# EAGLE board SparkFun_Line_Follower_Array_Panel_v10 (EAGLE 7.3.0), part 1 of 5
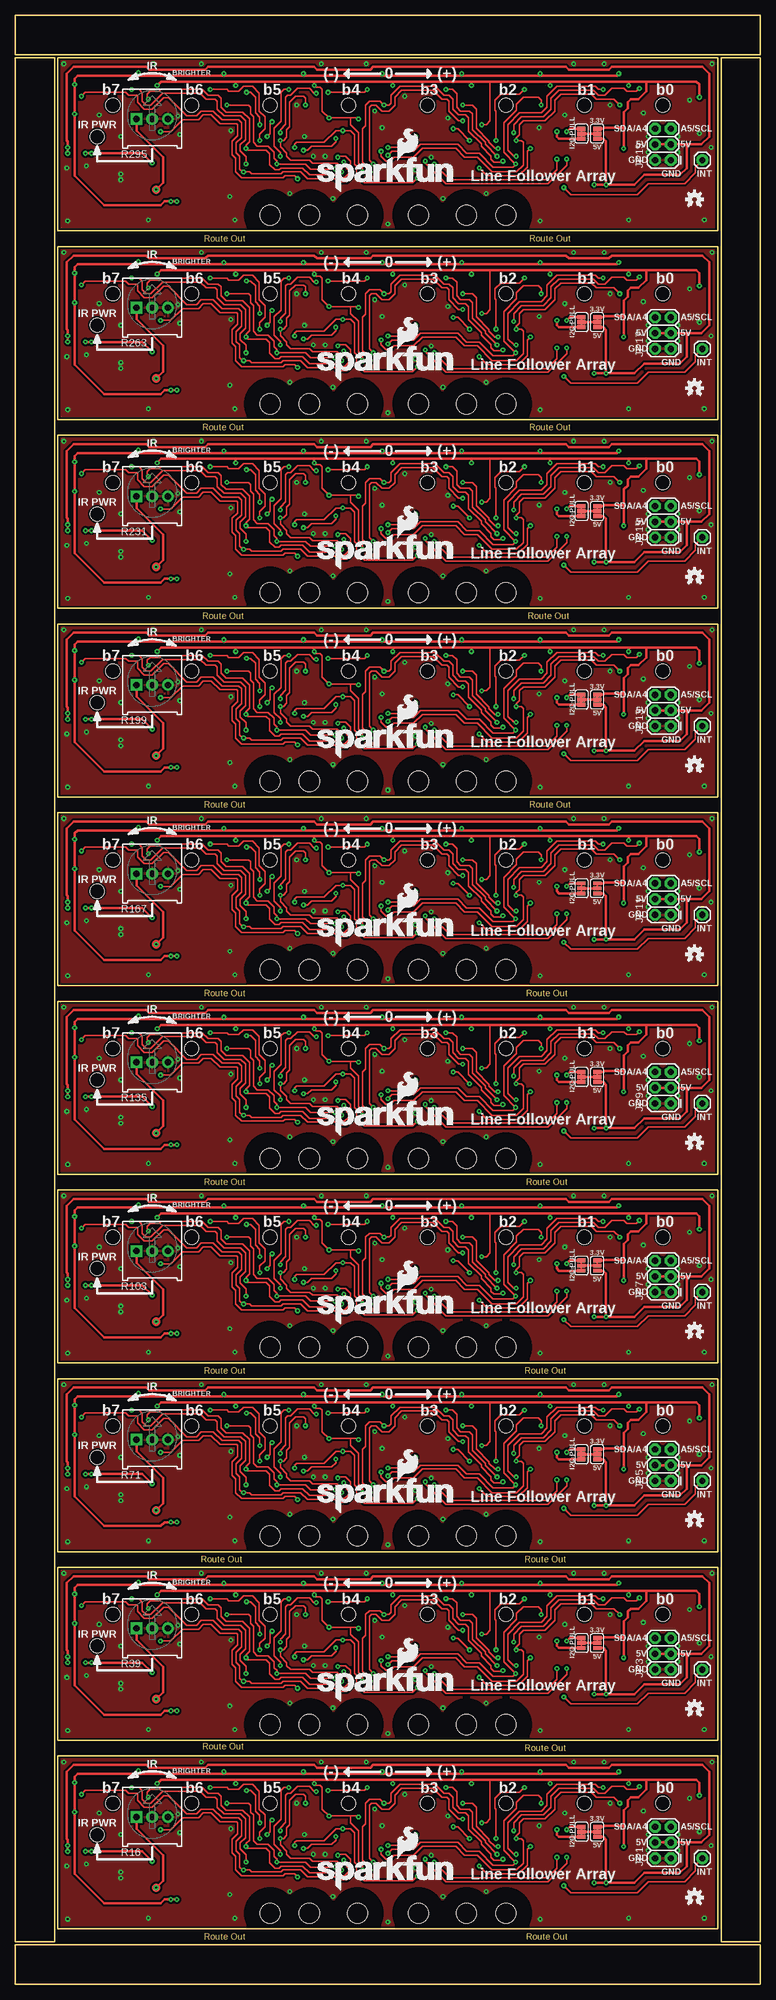
[diagram p0: board, top side]
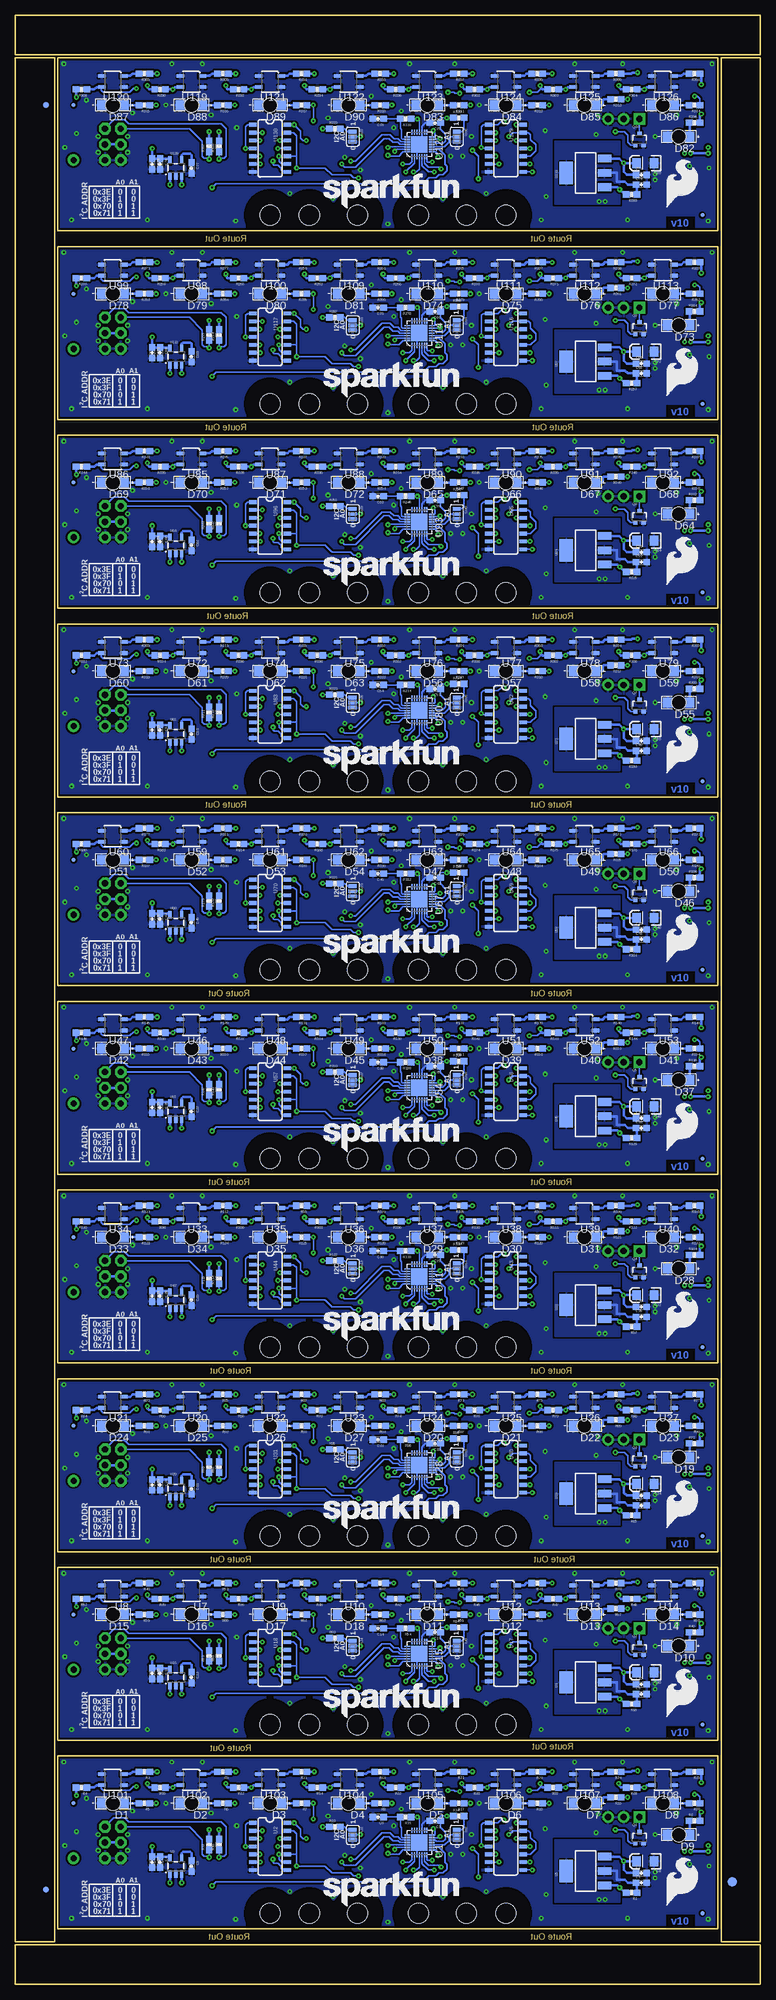
[diagram p1: board, bottom side, seen from below]

Size 120.4 x 318.01 mm. Coordinates in mm from the lower left corner, seen from the top.
Outline: 64 segments
Copper layers (1*16): Top 0.035mm / dielectric 1.5mm / Bottom 0.035mm
Design rules "SparkFun-2-layer *": minimum track width 7mil, minimum drill 15mil, track to track 7mil, track to pad 7mil, pad to pad 7mil, via to via 7mil, smd to smd 7mil, copper to edge 8mil, drill to drill 8mil, minimum pad ring 12mil, minimum via ring 10mil, stop-mask expansion 4mil, vias tented up to drill 20mil, thermal gap 10mil
Net classes: 0 default: clearance 0.305 mm
tRestrict: area 75.5,7.7 to 83,15.1; area 69.2,7.7 to 76.6,15.1; area 61.4,7.7 to 68.8,15.1; area 51.6,7.7 to 59,15.1; area 43.8,7.7 to 51.2,15.1; area 37.4,7.7 to 44.9,15.1; area 75.5,38.2 to 83,45.6; area 69.2,38.2 to 76.6,45.6; area 61.4,38.2 to 68.8,45.6; area 51.6,38.2 to 59,45.6; area 43.8,38.2 to 51.2,45.6; area 37.4,38.2 to 44.9,45.6; 48 more areas
bRestrict: area 37.4,7.7 to 44.9,15.1; area 43.8,7.7 to 51.2,15.1; area 51.6,7.7 to 59,15.1; area 61.4,7.7 to 68.8,15.1; area 69.2,7.7 to 76.6,15.1; area 75.5,7.7 to 83,15.1; area 37.4,38.2 to 44.9,45.6; area 43.8,38.2 to 51.2,45.6; area 51.6,38.2 to 59,45.6; area 61.4,38.2 to 68.8,45.6; area 69.2,38.2 to 76.6,45.6; area 75.5,38.2 to 83,45.6; 48 more areas

## Footprints (pad centres in the part's own frame; a part is rotated, then mirrored left to right if it is on the bottom)
0603-CAP = smd 1.1 x 1: 1 -0.85,0; 2 0.85,0
EIA3216 = smd 1.4 x 1.6: A 1.4,0; C -1.4,0
LED-1206-BOTTOM = smd 1.5 x 1.6: A -1.8,0; C 1.8,0 | hole 2.3: 0,0
FIDUCIAL-1.5X3 = smd 1.5 x 1.5: 1 0,0
FIDUCIAL-1X2 = smd 1 x 1: 1 0,0
MICRO-FIDUCIAL = smd 0.635 x 0.635: 1 0,0
2X3 = drill 1.016 pad 1.88 octagon: 1 0,0; 2 0,2.54; 3 2.54,0; 4 2.54,2.54; 5 5.08,0; 6 5.08,2.54
1X01 = drill 1.016 pad 1.88: 1 0,0
SOT323 = smd 0.7 x 0.7: 1 -0.65,-0.925; 2 0.65,-0.925; 3 0,0.925
0603-RES = smd 1.1 x 1: 1 -0.85,0; 2 0.85,0
3386U = drill 1.016 pad 1.88 square: 1 -2.54,-0.015 | drill 1.016 pad 1.88: 2 0,-0.015; 3 2.54,-0.015
PAD-JUMPER-3-2OF3_NC_BY_PASTE_YES_SILK_FULL_BOX = smd 0.635 x 1.27: 1 -0.813,0; 2 0,0; 3 0.813,0
PAD-JUMPER-3-3OF3_NC_BY_TRACE_YES_SILK_FULL_BOX = smd 0.635 x 1.27: 1 -0.813,0; 2 0,0; 3 0.813,0
PAD-JUMPER-3-2OF3_NC_BY_TRACE_YES_SILK_FULL_BOX = smd 0.635 x 1.27: 1 -0.813,0; 2 0,0; 3 0.813,0
STAND-OFF = hole 3.302: 0,0
QFN-28 = smd 0.85 x 0.2: 1 -1.975,1.2; 2 -1.975,0.8; 3 -1.975,0.4; 4 -1.975,0; 5 -1.975,-0.4; 6 -1.975,-0.8; 7 -1.975,-1.2; 15 1.975,-1.2; 16 1.975,-0.8; 17 1.975,-0.4; 18 1.975,0; 19 1.975,0.4; 20 1.975,0.8; 21 1.975,1.2 | smd 0.2 x 0.85: 8 -1.2,-1.975; 9 -0.8,-1.975; 10 -0.4,-1.975; 11 0,-1.975; 12 0.4,-1.975; 13 0.8,-1.975; 14 1.2,-1.975; 22 1.2,1.975; 23 0.8,1.975; 24 0.4,1.975; 25 0,1.975; 26 -0.4,1.975; 27 -0.8,1.975; 28 -1.2,1.975 | smd 2.65 x 2.65: 29 0,0
SO14 = smd 0.6 x 1.2: 1 -3.81,-2.8; 2 -2.54,-2.8; 3 -1.27,-2.8; 4 0,-2.8; 5 1.27,-2.8; 6 2.54,-2.8; 7 3.81,-2.8; 8 3.81,2.8; 9 2.54,2.8; 10 1.27,2.8; 11 0,2.8; 12 -1.27,2.8; 13 -2.54,2.8; 14 -3.81,2.8
SOT23-5 = smd 0.55 x 1.2: 1 -0.95,-1.3; 2 0,-1.3; 3 0.95,-1.3; 4 0.95,1.3; 5 -0.95,1.3
SOT223 = smd 1.219 x 2.235: 1 -2.311,-3.099; 2 0,-3.099; 3 2.311,-3.099 | smd 3.6 x 2.2: 4 0,3.099
QRE1113 = smd 1.2 x 0.6: 1 -1.8,-0.9; 2 1.8,-0.9; 3 1.8,0.9; 4 -1.8,0.9

## Placement (x,y rotation side)
C1  1.0uF  [0603-CAP]  19.24,16.35 0 bottom
C2  1.0uF  [0603-CAP]  19.24,17.94 0 bottom
C3  1.0uF  [0603-CAP]  52.58,26.35 180 bottom
C4  2.2uF  [0603-CAP]  97.03,19.68 270 bottom
C5  470pF  [0603-CAP]  91.95,19.05 270 bottom
C6  470pF  [0603-CAP]  61.79,26.99 180 bottom
C7  2.2uF  [0603-CAP]  98.3,19.68 270 bottom
C8  10uF  [EIA3216]  18.61,19.84 180 bottom
C9  1.0uF  [0603-CAP]  19.24,46.83 0 bottom
C10  1.0uF  [0603-CAP]  19.24,48.42 0 bottom
C11  1.0uF  [0603-CAP]  52.58,56.83 180 bottom
C12  2.2uF  [0603-CAP]  97.03,50.16 270 bottom
C13  470pF  [0603-CAP]  91.95,49.53 270 bottom
C14  470pF  [0603-CAP]  61.79,57.47 180 bottom
C15  2.2uF  [0603-CAP]  98.3,50.16 270 bottom
C16  10uF  [EIA3216]  18.61,50.32 180 bottom
C17  1.0uF  [0603-CAP]  19.24,77.31 0 bottom
C18  1.0uF  [0603-CAP]  19.24,78.9 0 bottom
C19  1.0uF  [0603-CAP]  52.58,87.31 180 bottom
C20  2.2uF  [0603-CAP]  97.03,80.64 270 bottom
C21  470pF  [0603-CAP]  91.95,80.01 270 bottom
C22  470pF  [0603-CAP]  61.79,87.95 180 bottom
C23  2.2uF  [0603-CAP]  98.3,80.64 270 bottom
C24  10uF  [EIA3216]  18.61,80.8 180 bottom
C25  1.0uF  [0603-CAP]  19.24,107.79 0 bottom
C26  1.0uF  [0603-CAP]  19.24,109.38 0 bottom
C27  1.0uF  [0603-CAP]  52.58,117.79 180 bottom
C28  2.2uF  [0603-CAP]  97.03,111.12 270 bottom
C29  470pF  [0603-CAP]  91.95,110.49 270 bottom
C30  470pF  [0603-CAP]  61.79,118.43 180 bottom
C31  2.2uF  [0603-CAP]  98.3,111.12 270 bottom
C32  10uF  [EIA3216]  18.61,111.28 180 bottom
C33  1.0uF  [0603-CAP]  19.24,138.27 0 bottom
C34  1.0uF  [0603-CAP]  19.24,139.86 0 bottom
C35  1.0uF  [0603-CAP]  52.58,148.27 180 bottom
C36  2.2uF  [0603-CAP]  97.03,141.6 270 bottom
C37  470pF  [0603-CAP]  91.95,140.97 270 bottom
C38  470pF  [0603-CAP]  61.79,148.91 180 bottom
C39  2.2uF  [0603-CAP]  98.3,141.6 270 bottom
C40  10uF  [EIA3216]  18.61,141.76 180 bottom
C41  1.0uF  [0603-CAP]  19.24,168.75 0 bottom
C42  1.0uF  [0603-CAP]  19.24,170.34 0 bottom
C43  1.0uF  [0603-CAP]  52.58,178.75 180 bottom
C44  2.2uF  [0603-CAP]  97.03,172.09 270 bottom
C45  470pF  [0603-CAP]  91.95,171.45 270 bottom
C46  470pF  [0603-CAP]  61.79,179.39 180 bottom
C47  2.2uF  [0603-CAP]  98.3,172.09 270 bottom
C48  10uF  [EIA3216]  18.61,172.24 180 bottom
C49  1.0uF  [0603-CAP]  19.24,199.23 0 bottom
C50  1.0uF  [0603-CAP]  19.24,200.82 0 bottom
C51  1.0uF  [0603-CAP]  52.58,209.23 180 bottom
C52  2.2uF  [0603-CAP]  97.03,202.56 270 bottom
C53  470pF  [0603-CAP]  91.95,201.93 270 bottom
C54  470pF  [0603-CAP]  61.79,209.87 180 bottom
C55  2.2uF  [0603-CAP]  98.3,202.56 270 bottom
C56  10uF  [EIA3216]  18.61,202.72 180 bottom
C57  1.0uF  [0603-CAP]  19.24,229.71 0 bottom
C58  1.0uF  [0603-CAP]  19.24,231.3 0 bottom
C59  1.0uF  [0603-CAP]  52.58,239.71 180 bottom
C60  2.2uF  [0603-CAP]  97.03,233.04 270 bottom
C61  470pF  [0603-CAP]  91.95,232.41 270 bottom
C62  470pF  [0603-CAP]  61.79,240.35 180 bottom
C63  2.2uF  [0603-CAP]  98.3,233.04 270 bottom
C64  10uF  [EIA3216]  18.61,233.2 180 bottom
C65  1.0uF  [0603-CAP]  19.24,260.19 0 bottom
C66  1.0uF  [0603-CAP]  19.24,261.78 0 bottom
C67  1.0uF  [0603-CAP]  52.58,270.19 180 bottom
C68  2.2uF  [0603-CAP]  97.03,263.52 270 bottom
C69  470pF  [0603-CAP]  91.95,262.89 270 bottom
C70  470pF  [0603-CAP]  61.79,270.83 180 bottom
C71  2.2uF  [0603-CAP]  98.3,263.52 270 bottom
C72  10uF  [EIA3216]  18.61,263.68 180 bottom
C73  1.0uF  [0603-CAP]  19.24,290.67 0 bottom
C74  1.0uF  [0603-CAP]  19.24,292.26 0 bottom
C75  1.0uF  [0603-CAP]  52.58,300.67 180 bottom
C76  2.2uF  [0603-CAP]  97.03,294 270 bottom
C77  470pF  [0603-CAP]  91.95,293.37 270 bottom
C78  470pF  [0603-CAP]  61.79,301.31 180 bottom
C79  2.2uF  [0603-CAP]  98.3,294 270 bottom
C80  10uF  [EIA3216]  18.61,294.16 180 bottom
D1  Green  [LED-1206-BOTTOM]  104.65,29.21 180 bottom
D2  Green  [LED-1206-BOTTOM]  91.95,29.21 180 bottom
D3  Green  [LED-1206-BOTTOM]  79.25,29.21 180 bottom
D4  Green  [LED-1206-BOTTOM]  66.55,29.21 180 bottom
D5  Green  [LED-1206-BOTTOM]  53.85,29.21 180 bottom
D6  Green  [LED-1206-BOTTOM]  41.15,29.21 180 bottom
D7  Green  [LED-1206-BOTTOM]  28.45,29.21 180 bottom
D8  Green  [LED-1206-BOTTOM]  15.75,29.21 180 bottom
D9  Green  [LED-1206-BOTTOM]  13.21,24.13 180 bottom
D10  Green  [LED-1206-BOTTOM]  13.21,54.61 180 bottom
D11  Green  [LED-1206-BOTTOM]  53.85,59.69 180 bottom
D12  Green  [LED-1206-BOTTOM]  41.15,59.69 180 bottom
D13  Green  [LED-1206-BOTTOM]  28.45,59.69 180 bottom
D14  Green  [LED-1206-BOTTOM]  15.75,59.69 180 bottom
D15  Green  [LED-1206-BOTTOM]  104.65,59.69 180 bottom
D16  Green  [LED-1206-BOTTOM]  91.95,59.69 180 bottom
D17  Green  [LED-1206-BOTTOM]  79.25,59.69 180 bottom
D18  Green  [LED-1206-BOTTOM]  66.55,59.69 180 bottom
D19  Green  [LED-1206-BOTTOM]  13.21,85.09 180 bottom
D20  Green  [LED-1206-BOTTOM]  53.85,90.17 180 bottom
D21  Green  [LED-1206-BOTTOM]  41.15,90.17 180 bottom
D22  Green  [LED-1206-BOTTOM]  28.45,90.17 180 bottom
D23  Green  [LED-1206-BOTTOM]  15.75,90.17 180 bottom
D24  Green  [LED-1206-BOTTOM]  104.65,90.17 180 bottom
D25  Green  [LED-1206-BOTTOM]  91.95,90.17 180 bottom
D26  Green  [LED-1206-BOTTOM]  79.25,90.17 180 bottom
D27  Green  [LED-1206-BOTTOM]  66.55,90.17 180 bottom
D28  Green  [LED-1206-BOTTOM]  13.21,115.57 180 bottom
D29  Green  [LED-1206-BOTTOM]  53.85,120.65 180 bottom
D30  Green  [LED-1206-BOTTOM]  41.15,120.65 180 bottom
D31  Green  [LED-1206-BOTTOM]  28.45,120.65 180 bottom
D32  Green  [LED-1206-BOTTOM]  15.75,120.65 180 bottom
D33  Green  [LED-1206-BOTTOM]  104.65,120.65 180 bottom
D34  Green  [LED-1206-BOTTOM]  91.95,120.65 180 bottom
D35  Green  [LED-1206-BOTTOM]  79.25,120.65 180 bottom
D36  Green  [LED-1206-BOTTOM]  66.55,120.65 180 bottom
D37  Green  [LED-1206-BOTTOM]  13.21,146.05 180 bottom
D38  Green  [LED-1206-BOTTOM]  53.85,151.13 180 bottom
D39  Green  [LED-1206-BOTTOM]  41.15,151.13 180 bottom
D40  Green  [LED-1206-BOTTOM]  28.45,151.13 180 bottom
D41  Green  [LED-1206-BOTTOM]  15.75,151.13 180 bottom
D42  Green  [LED-1206-BOTTOM]  104.65,151.13 180 bottom
D43  Green  [LED-1206-BOTTOM]  91.95,151.13 180 bottom
D44  Green  [LED-1206-BOTTOM]  79.25,151.13 180 bottom
D45  Green  [LED-1206-BOTTOM]  66.55,151.13 180 bottom
D46  Green  [LED-1206-BOTTOM]  13.21,176.53 180 bottom
D47  Green  [LED-1206-BOTTOM]  53.85,181.61 180 bottom
D48  Green  [LED-1206-BOTTOM]  41.15,181.61 180 bottom
D49  Green  [LED-1206-BOTTOM]  28.45,181.61 180 bottom
D50  Green  [LED-1206-BOTTOM]  15.75,181.61 180 bottom
D51  Green  [LED-1206-BOTTOM]  104.65,181.61 180 bottom
D52  Green  [LED-1206-BOTTOM]  91.95,181.61 180 bottom
D53  Green  [LED-1206-BOTTOM]  79.25,181.61 180 bottom
D54  Green  [LED-1206-BOTTOM]  66.55,181.61 180 bottom
D55  Green  [LED-1206-BOTTOM]  13.21,207.01 180 bottom
D56  Green  [LED-1206-BOTTOM]  53.85,212.09 180 bottom
D57  Green  [LED-1206-BOTTOM]  41.15,212.09 180 bottom
D58  Green  [LED-1206-BOTTOM]  28.45,212.09 180 bottom
D59  Green  [LED-1206-BOTTOM]  15.75,212.09 180 bottom
D60  Green  [LED-1206-BOTTOM]  104.65,212.09 180 bottom
D61  Green  [LED-1206-BOTTOM]  91.95,212.09 180 bottom
D62  Green  [LED-1206-BOTTOM]  79.25,212.09 180 bottom
D63  Green  [LED-1206-BOTTOM]  66.55,212.09 180 bottom
D64  Green  [LED-1206-BOTTOM]  13.21,237.49 180 bottom
D65  Green  [LED-1206-BOTTOM]  53.85,242.57 180 bottom
D66  Green  [LED-1206-BOTTOM]  41.15,242.57 180 bottom
D67  Green  [LED-1206-BOTTOM]  28.45,242.57 180 bottom
D68  Green  [LED-1206-BOTTOM]  15.75,242.57 180 bottom
D69  Green  [LED-1206-BOTTOM]  104.65,242.57 180 bottom
D70  Green  [LED-1206-BOTTOM]  91.95,242.57 180 bottom
D71  Green  [LED-1206-BOTTOM]  79.25,242.57 180 bottom
D72  Green  [LED-1206-BOTTOM]  66.55,242.57 180 bottom
D73  Green  [LED-1206-BOTTOM]  13.21,267.97 180 bottom
D74  Green  [LED-1206-BOTTOM]  53.85,273.05 180 bottom
D75  Green  [LED-1206-BOTTOM]  41.15,273.05 180 bottom
D76  Green  [LED-1206-BOTTOM]  28.45,273.05 180 bottom
D77  Green  [LED-1206-BOTTOM]  15.75,273.05 180 bottom
D78  Green  [LED-1206-BOTTOM]  104.65,273.05 180 bottom
D79  Green  [LED-1206-BOTTOM]  91.95,273.05 180 bottom
D80  Green  [LED-1206-BOTTOM]  79.25,273.05 180 bottom
D81  Green  [LED-1206-BOTTOM]  66.55,273.05 180 bottom
D82  Green  [LED-1206-BOTTOM]  13.21,298.45 180 bottom
D83  Green  [LED-1206-BOTTOM]  53.85,303.53 180 bottom
D84  Green  [LED-1206-BOTTOM]  41.15,303.53 180 bottom
D85  Green  [LED-1206-BOTTOM]  28.45,303.53 180 bottom
D86  Green  [LED-1206-BOTTOM]  15.75,303.53 180 bottom
D87  Green  [LED-1206-BOTTOM]  104.65,303.53 180 bottom
D88  Green  [LED-1206-BOTTOM]  91.95,303.53 180 bottom
D89  Green  [LED-1206-BOTTOM]  79.25,303.53 180 bottom
D90  Green  [LED-1206-BOTTOM]  66.55,303.53 180 bottom
E$1  [FIDUCIAL-1.5X3]  4.57,16.51 0 bottom
E$5  [FIDUCIAL-1X2]  115.44,15.24 0 bottom
E$6  [FIDUCIAL-1X2]  115.44,303.53 180 bottom
FID1  FIDUCIALUFIDUCIAL  [MICRO-FIDUCIAL]  9.4,11.43 0 bottom
FID2  FIDUCIALUFIDUCIAL  [MICRO-FIDUCIAL]  111,29.21 0 bottom
FID3  FIDUCIALUFIDUCIAL  [MICRO-FIDUCIAL]  9.4,41.91 0 bottom
FID4  FIDUCIALUFIDUCIAL  [MICRO-FIDUCIAL]  111,59.69 0 bottom
FID5  FIDUCIALUFIDUCIAL  [MICRO-FIDUCIAL]  9.4,72.39 0 bottom
FID6  FIDUCIALUFIDUCIAL  [MICRO-FIDUCIAL]  111,90.17 0 bottom
FID7  FIDUCIALUFIDUCIAL  [MICRO-FIDUCIAL]  9.4,102.87 0 bottom
FID8  FIDUCIALUFIDUCIAL  [MICRO-FIDUCIAL]  111,120.65 0 bottom
FID9  FIDUCIALUFIDUCIAL  [MICRO-FIDUCIAL]  9.4,133.35 0 bottom
FID10  FIDUCIALUFIDUCIAL  [MICRO-FIDUCIAL]  111,151.13 0 bottom
FID11  FIDUCIALUFIDUCIAL  [MICRO-FIDUCIAL]  9.4,163.83 0 bottom
FID12  FIDUCIALUFIDUCIAL  [MICRO-FIDUCIAL]  111,181.61 0 bottom
FID13  FIDUCIALUFIDUCIAL  [MICRO-FIDUCIAL]  9.4,194.31 0 bottom
FID14  FIDUCIALUFIDUCIAL  [MICRO-FIDUCIAL]  111,212.09 0 bottom
FID15  FIDUCIALUFIDUCIAL  [MICRO-FIDUCIAL]  9.4,224.79 0 bottom
FID16  FIDUCIALUFIDUCIAL  [MICRO-FIDUCIAL]  111,242.57 0 bottom
FID17  FIDUCIALUFIDUCIAL  [MICRO-FIDUCIAL]  9.4,255.27 0 bottom
FID18  FIDUCIALUFIDUCIAL  [MICRO-FIDUCIAL]  111,273.05 0 bottom
FID19  FIDUCIALUFIDUCIAL  [MICRO-FIDUCIAL]  9.4,285.75 0 bottom
FID20  FIDUCIALUFIDUCIAL  [MICRO-FIDUCIAL]  111,303.53 0 bottom
JP1  FEMALE 2x3  [2X3]  105.92,20.32 90 top
JP2  INT  [1X01]  111,20.32 0 top
JP3  FEMALE 2x3  [2X3]  105.92,50.8 90 top
JP4  INT  [1X01]  111,50.8 0 top
JP5  FEMALE 2x3  [2X3]  105.92,81.28 90 top
JP6  INT  [1X01]  111,81.28 0 top
JP7  FEMALE 2x3  [2X3]  105.92,111.76 90 top
JP8  INT  [1X01]  111,111.76 0 top
JP9  FEMALE 2x3  [2X3]  105.92,142.24 90 top
JP10  INT  [1X01]  111,142.24 0 top
JP11  FEMALE 2x3  [2X3]  105.92,172.72 90 top
JP12  INT  [1X01]  111,172.72 0 top
JP13  FEMALE 2x3  [2X3]  105.92,203.2 90 top
JP14  INT  [1X01]  111,203.2 0 top
JP15  FEMALE 2x3  [2X3]  105.92,233.68 90 top
JP16  INT  [1X01]  111,233.68 0 top
JP17  FEMALE 2x3  [2X3]  105.92,264.16 90 top
JP18  INT  [1X01]  111,264.16 0 top
JP19  FEMALE 2x3  [2X3]  105.92,294.64 90 top
JP20  INT  [1X01]  111,294.64 0 top
LOGO1  SFE_LOGO_NAME_FLAME.2_INCH  [SFE_LOGO_NAME_FLAME_.2]  48.13,15.08 0 top
LOGO2  SFE_LOGO_NAME.2_INCH  [SFE_LOGO_NAME_.2]  70.55,12.53 0 bottom
LOGO3  SFE_LOGO_NAME.2_INCH  [SFE_LOGO_NAME_.2]  70.55,43.01 0 bottom
LOGO4  SFE_LOGO_FLAME.3_INCH  [SFE_LOGO_FLAME_.3]  15.67,43.05 0 bottom
LOGO5  SFE_LOGO_FLAME.3_INCH  [SFE_LOGO_FLAME_.3]  15.67,12.57 0 bottom
LOGO6  OSHW-LOGOS  [OSHW-LOGO-S]  109.73,13.97 0 top
LOGO7  OSHW-LOGOS  [OSHW-LOGO-S]  109.73,44.45 0 top
LOGO8  SFE_LOGO_NAME_FLAME.2_INCH  [SFE_LOGO_NAME_FLAME_.2]  48.13,45.56 0 top
LOGO9  SFE_LOGO_NAME.2_INCH  [SFE_LOGO_NAME_.2]  70.55,73.49 0 bottom
LOGO10  SFE_LOGO_FLAME.3_INCH  [SFE_LOGO_FLAME_.3]  15.67,73.53 0 bottom
LOGO11  OSHW-LOGOS  [OSHW-LOGO-S]  109.73,74.93 0 top
LOGO12  SFE_LOGO_NAME_FLAME.2_INCH  [SFE_LOGO_NAME_FLAME_.2]  48.13,76.04 0 top
LOGO13  SFE_LOGO_NAME.2_INCH  [SFE_LOGO_NAME_.2]  70.55,103.97 0 bottom
LOGO14  SFE_LOGO_FLAME.3_INCH  [SFE_LOGO_FLAME_.3]  15.67,104.01 0 bottom
LOGO15  OSHW-LOGOS  [OSHW-LOGO-S]  109.73,105.41 0 top
LOGO16  SFE_LOGO_NAME_FLAME.2_INCH  [SFE_LOGO_NAME_FLAME_.2]  48.13,106.52 0 top
LOGO17  SFE_LOGO_NAME.2_INCH  [SFE_LOGO_NAME_.2]  70.55,134.45 0 bottom
LOGO18  SFE_LOGO_FLAME.3_INCH  [SFE_LOGO_FLAME_.3]  15.67,134.49 0 bottom
LOGO19  OSHW-LOGOS  [OSHW-LOGO-S]  109.73,135.89 0 top
LOGO20  SFE_LOGO_NAME_FLAME.2_INCH  [SFE_LOGO_NAME_FLAME_.2]  48.13,137 0 top
LOGO21  SFE_LOGO_NAME.2_INCH  [SFE_LOGO_NAME_.2]  70.55,164.93 0 bottom
LOGO22  SFE_LOGO_FLAME.3_INCH  [SFE_LOGO_FLAME_.3]  15.67,164.97 0 bottom
LOGO23  OSHW-LOGOS  [OSHW-LOGO-S]  109.73,166.37 0 top
LOGO24  SFE_LOGO_NAME_FLAME.2_INCH  [SFE_LOGO_NAME_FLAME_.2]  48.13,167.48 0 top
LOGO25  SFE_LOGO_NAME.2_INCH  [SFE_LOGO_NAME_.2]  70.55,195.41 0 bottom
LOGO26  SFE_LOGO_FLAME.3_INCH  [SFE_LOGO_FLAME_.3]  15.67,195.45 0 bottom
LOGO27  OSHW-LOGOS  [OSHW-LOGO-S]  109.73,196.85 0 top
LOGO28  SFE_LOGO_NAME_FLAME.2_INCH  [SFE_LOGO_NAME_FLAME_.2]  48.13,197.96 0 top
LOGO29  SFE_LOGO_NAME.2_INCH  [SFE_LOGO_NAME_.2]  70.55,225.89 0 bottom
LOGO30  SFE_LOGO_FLAME.3_INCH  [SFE_LOGO_FLAME_.3]  15.67,225.93 0 bottom
LOGO31  OSHW-LOGOS  [OSHW-LOGO-S]  109.73,227.33 0 top
LOGO32  SFE_LOGO_NAME_FLAME.2_INCH  [SFE_LOGO_NAME_FLAME_.2]  48.13,228.44 0 top
LOGO33  SFE_LOGO_NAME.2_INCH  [SFE_LOGO_NAME_.2]  70.55,256.37 0 bottom
LOGO34  SFE_LOGO_FLAME.3_INCH  [SFE_LOGO_FLAME_.3]  15.67,256.41 0 bottom
LOGO35  OSHW-LOGOS  [OSHW-LOGO-S]  109.73,257.81 0 top
LOGO36  SFE_LOGO_NAME_FLAME.2_INCH  [SFE_LOGO_NAME_FLAME_.2]  48.13,258.92 0 top
LOGO37  SFE_LOGO_NAME.2_INCH  [SFE_LOGO_NAME_.2]  70.55,286.85 0 bottom
LOGO38  SFE_LOGO_FLAME.3_INCH  [SFE_LOGO_FLAME_.3]  15.67,286.89 0 bottom
LOGO39  OSHW-LOGOS  [OSHW-LOGO-S]  109.73,288.29 0 top
LOGO40  SFE_LOGO_NAME_FLAME.2_INCH  [SFE_LOGO_NAME_FLAME_.2]  48.13,289.4 0 top
Q1  MOSFET-NCHANNEL2N7002PW  [SOT323]  19.56,23.65 0 bottom
Q2  MOSFET-NCHANNEL2N7002PW  [SOT323]  19.56,54.13 0 bottom
Q3  MOSFET-NCHANNEL2N7002PW  [SOT323]  19.56,84.61 0 bottom
Q4  MOSFET-NCHANNEL2N7002PW  [SOT323]  19.56,115.09 0 bottom
Q5  MOSFET-NCHANNEL2N7002PW  [SOT323]  19.56,145.57 0 bottom
Q6  MOSFET-NCHANNEL2N7002PW  [SOT323]  19.56,176.05 0 bottom
Q7  MOSFET-NCHANNEL2N7002PW  [SOT323]  19.56,206.53 0 bottom
Q8  MOSFET-NCHANNEL2N7002PW  [SOT323]  19.56,237.01 0 bottom
Q9  MOSFET-NCHANNEL2N7002PW  [SOT323]  19.56,267.49 0 bottom
Q10  MOSFET-NCHANNEL2N7002PW  [SOT323]  19.56,297.97 0 bottom
R1  4.7K  [0603-RES]  20.83,14.76 180 bottom
R2  330  [0603-RES]  10.67,26.35 0 bottom
R3  100  [0603-RES]  99.57,34.29 180 bottom
R4  68.1k  [0603-RES]  109.73,31.75 180 bottom
R5  1K  [0603-RES]  99.57,29.21 180 bottom
R6  1K  [0603-RES]  86.87,29.21 180 bottom
R7  1K  [0603-RES]  74.17,29.21 180 bottom
R8  1K  [0603-RES]  61.47,29.21 180 bottom
R9  100  [0603-RES]  86.87,34.29 180 bottom
R10  68.1k  [0603-RES]  97.03,31.75 180 bottom
R11  100  [0603-RES]  74.17,34.29 180 bottom
R12  68.1k  [0603-RES]  84.33,31.75 180 bottom
R13  100  [0603-RES]  61.47,34.29 180 bottom
R14  68.1k  [0603-RES]  71.63,31.75 180 bottom
R15  4.7K  [0603-RES]  20.83,45.24 180 bottom
R16  TSR-3386  [3386U]  22.1,26.99 0 top
R17  1K  [0603-RES]  48.77,29.21 180 bottom
R18  1K  [0603-RES]  36.07,29.21 180 bottom
R19  1K  [0603-RES]  23.37,30.16 180 bottom
R20  1K  [0603-RES]  10.67,29.21 180 bottom
R21  100  [0603-RES]  48.77,34.29 180 bottom
R22  68.1k  [0603-RES]  58.93,31.75 180 bottom
R23  100  [0603-RES]  36.07,34.29 180 bottom
R24  100  [0603-RES]  23.37,34.29 180 bottom
R25  100  [0603-RES]  10.67,34.29 180 bottom
R26  68.1k  [0603-RES]  46.23,31.75 180 bottom
R27  68.1k  [0603-RES]  33.53,31.75 180 bottom
R28  68.1k  [0603-RES]  20.83,31.75 180 bottom
R29  68.1k  [0603-RES]  97.03,62.23 180 bottom
R30  4.7K  [0603-RES]  87.5,22.54 90 bottom
R31  100  [0603-RES]  57.34,26.99 180 bottom
R32  4.7K  [0603-RES]  89.09,22.54 90 bottom
R33  4.7K  [0603-RES]  68.77,25.4 0 bottom
R34  4.7K  [0603-RES]  48.77,27.15 0 bottom
R35  100  [0603-RES]  74.17,64.77 180 bottom
R36  68.1k  [0603-RES]  84.33,62.23 180 bottom
R37  100  [0603-RES]  61.47,64.77 180 bottom
R38  68.1k  [0603-RES]  71.63,62.23 180 bottom
R39  TSR-3386  [3386U]  22.1,57.47 0 top
R40  330  [0603-RES]  10.67,56.83 0 bottom
R41  100  [0603-RES]  48.77,64.77 180 bottom
R42  68.1k  [0603-RES]  58.93,62.23 180 bottom
R43  100  [0603-RES]  36.07,64.77 180 bottom
R44  100  [0603-RES]  23.37,64.77 180 bottom
R45  100  [0603-RES]  10.67,64.77 180 bottom
R46  68.1k  [0603-RES]  46.23,62.23 180 bottom
R47  68.1k  [0603-RES]  33.53,62.23 180 bottom
R48  68.1k  [0603-RES]  20.83,62.23 180 bottom
R49  100  [0603-RES]  99.57,64.77 180 bottom
R50  4.7K  [0603-RES]  87.5,53.02 90 bottom
R51  4.7K  [0603-RES]  89.09,53.02 90 bottom
R52  68.1k  [0603-RES]  109.73,62.23 180 bottom
R53  100  [0603-RES]  86.87,64.77 180 bottom
R54  100  [0603-RES]  57.34,57.47 180 bottom
R55  1K  [0603-RES]  48.77,59.69 180 bottom
R56  1K  [0603-RES]  36.07,59.69 180 bottom
R57  1K  [0603-RES]  23.37,60.64 180 bottom
R58  1K  [0603-RES]  10.67,59.69 180 bottom
R59  1K  [0603-RES]  99.57,59.69 180 bottom
R60  1K  [0603-RES]  86.87,59.69 180 bottom
R61  1K  [0603-RES]  74.17,59.69 180 bottom
R62  1K  [0603-RES]  61.47,59.69 180 bottom
R63  4.7K  [0603-RES]  68.77,55.88 0 bottom
R64  4.7K  [0603-RES]  48.77,57.63 0 bottom
R65  4.7K  [0603-RES]  20.83,75.72 180 bottom
R66  68.1k  [0603-RES]  97.03,92.71 180 bottom
R67  100  [0603-RES]  74.17,95.25 180 bottom
R68  68.1k  [0603-RES]  84.33,92.71 180 bottom
R69  100  [0603-RES]  61.47,95.25 180 bottom
R70  68.1k  [0603-RES]  71.63,92.71 180 bottom
R71  TSR-3386  [3386U]  22.1,87.95 0 top
R72  330  [0603-RES]  10.67,87.31 0 bottom
R73  100  [0603-RES]  48.77,95.25 180 bottom
R74  68.1k  [0603-RES]  58.93,92.71 180 bottom
R75  100  [0603-RES]  36.07,95.25 180 bottom
R76  100  [0603-RES]  23.37,95.25 180 bottom
R77  100  [0603-RES]  10.67,95.25 180 bottom
R78  68.1k  [0603-RES]  46.23,92.71 180 bottom
R79  68.1k  [0603-RES]  33.53,92.71 180 bottom
R80  68.1k  [0603-RES]  20.83,92.71 180 bottom
R81  100  [0603-RES]  99.57,95.25 180 bottom
R82  4.7K  [0603-RES]  87.5,83.5 90 bottom
R83  4.7K  [0603-RES]  89.09,83.5 90 bottom
R84  68.1k  [0603-RES]  109.73,92.71 180 bottom
R85  100  [0603-RES]  86.87,95.25 180 bottom
R86  100  [0603-RES]  57.34,87.95 180 bottom
R87  1K  [0603-RES]  48.77,90.17 180 bottom
R88  1K  [0603-RES]  36.07,90.17 180 bottom
R89  1K  [0603-RES]  23.37,91.12 180 bottom
R90  1K  [0603-RES]  10.67,90.17 180 bottom
R91  1K  [0603-RES]  99.57,90.17 180 bottom
R92  1K  [0603-RES]  86.87,90.17 180 bottom
R93  1K  [0603-RES]  74.17,90.17 180 bottom
R94  1K  [0603-RES]  61.47,90.17 180 bottom
R95  4.7K  [0603-RES]  68.77,86.36 0 bottom
R96  4.7K  [0603-RES]  48.77,88.11 0 bottom
R97  4.7K  [0603-RES]  20.83,106.2 180 bottom
R98  68.1k  [0603-RES]  97.03,123.19 180 bottom
R99  100  [0603-RES]  74.17,125.73 180 bottom
R100  68.1k  [0603-RES]  84.33,123.19 180 bottom
R101  100  [0603-RES]  61.47,125.73 180 bottom
R102  68.1k  [0603-RES]  71.63,123.19 180 bottom
R103  TSR-3386  [3386U]  22.1,118.43 0 top
R104  330  [0603-RES]  10.67,117.79 0 bottom
R105  100  [0603-RES]  48.77,125.73 180 bottom
R106  68.1k  [0603-RES]  58.93,123.19 180 bottom
R107  100  [0603-RES]  36.07,125.73 180 bottom
R108  100  [0603-RES]  23.37,125.73 180 bottom
R109  100  [0603-RES]  10.67,125.73 180 bottom
R110  68.1k  [0603-RES]  46.23,123.19 180 bottom
R111  68.1k  [0603-RES]  33.53,123.19 180 bottom
R112  68.1k  [0603-RES]  20.83,123.19 180 bottom
R113  100  [0603-RES]  99.57,125.73 180 bottom
R114  4.7K  [0603-RES]  87.5,113.98 90 bottom
R115  4.7K  [0603-RES]  89.09,113.98 90 bottom
R116  68.1k  [0603-RES]  109.73,123.19 180 bottom
R117  100  [0603-RES]  86.87,125.73 180 bottom
R118  100  [0603-RES]  57.34,118.43 180 bottom
R119  1K  [0603-RES]  48.77,120.65 180 bottom
R120  1K  [0603-RES]  36.07,120.65 180 bottom
R121  1K  [0603-RES]  23.37,121.6 180 bottom
R122  1K  [0603-RES]  10.67,120.65 180 bottom
R123  1K  [0603-RES]  99.57,120.65 180 bottom
R124  1K  [0603-RES]  86.87,120.65 180 bottom
R125  1K  [0603-RES]  74.17,120.65 180 bottom
R126  1K  [0603-RES]  61.47,120.65 180 bottom
R127  4.7K  [0603-RES]  68.77,116.84 0 bottom
R128  4.7K  [0603-RES]  48.77,118.59 0 bottom
R129  4.7K  [0603-RES]  20.83,136.68 180 bottom
R130  68.1k  [0603-RES]  97.03,153.67 180 bottom
R131  100  [0603-RES]  74.17,156.21 180 bottom
R132  68.1k  [0603-RES]  84.33,153.67 180 bottom
R133  100  [0603-RES]  61.47,156.21 180 bottom
R134  68.1k  [0603-RES]  71.63,153.67 180 bottom
R135  TSR-3386  [3386U]  22.1,148.91 0 top
R136  330  [0603-RES]  10.67,148.27 0 bottom
R137  100  [0603-RES]  48.77,156.21 180 bottom
R138  68.1k  [0603-RES]  58.93,153.67 180 bottom
R139  100  [0603-RES]  36.07,156.21 180 bottom
R140  100  [0603-RES]  23.37,156.21 180 bottom
R141  100  [0603-RES]  10.67,156.21 180 bottom
R142  68.1k  [0603-RES]  46.23,153.67 180 bottom
R143  68.1k  [0603-RES]  33.53,153.67 180 bottom
R144  68.1k  [0603-RES]  20.83,153.67 180 bottom
R145  100  [0603-RES]  99.57,156.21 180 bottom
R146  4.7K  [0603-RES]  87.5,144.46 90 bottom
R147  4.7K  [0603-RES]  89.09,144.46 90 bottom
R148  68.1k  [0603-RES]  109.73,153.67 180 bottom
R149  100  [0603-RES]  86.87,156.21 180 bottom
R150  100  [0603-RES]  57.34,148.91 180 bottom
R151  1K  [0603-RES]  48.77,151.13 180 bottom
R152  1K  [0603-RES]  36.07,151.13 180 bottom
R153  1K  [0603-RES]  23.37,152.08 180 bottom
R154  1K  [0603-RES]  10.67,151.13 180 bottom
R155  1K  [0603-RES]  99.57,151.13 180 bottom
R156  1K  [0603-RES]  86.87,151.13 180 bottom
R157  1K  [0603-RES]  74.17,151.13 180 bottom
R158  1K  [0603-RES]  61.47,151.13 180 bottom
R159  4.7K  [0603-RES]  68.77,147.32 0 bottom
R160  4.7K  [0603-RES]  48.77,149.07 0 bottom
R161  4.7K  [0603-RES]  20.83,167.16 180 bottom
R162  68.1k  [0603-RES]  97.03,184.15 180 bottom
R163  100  [0603-RES]  74.17,186.69 180 bottom
R164  68.1k  [0603-RES]  84.33,184.15 180 bottom
R165  100  [0603-RES]  61.47,186.69 180 bottom
R166  68.1k  [0603-RES]  71.63,184.15 180 bottom
R167  TSR-3386  [3386U]  22.1,179.39 0 top
R168  330  [0603-RES]  10.67,178.75 0 bottom
R169  100  [0603-RES]  48.77,186.69 180 bottom
R170  68.1k  [0603-RES]  58.93,184.15 180 bottom
R171  100  [0603-RES]  36.07,186.69 180 bottom
R172  100  [0603-RES]  23.37,186.69 180 bottom
R173  100  [0603-RES]  10.67,186.69 180 bottom
R174  68.1k  [0603-RES]  46.23,184.15 180 bottom
R175  68.1k  [0603-RES]  33.53,184.15 180 bottom
R176  68.1k  [0603-RES]  20.83,184.15 180 bottom
R177  100  [0603-RES]  99.57,186.69 180 bottom
R178  4.7K  [0603-RES]  87.5,174.94 90 bottom
R179  4.7K  [0603-RES]  89.09,174.94 90 bottom
R180  68.1k  [0603-RES]  109.73,184.15 180 bottom
R181  100  [0603-RES]  86.87,186.69 180 bottom
R182  100  [0603-RES]  57.34,179.39 180 bottom
R183  1K  [0603-RES]  48.77,181.61 180 bottom
R184  1K  [0603-RES]  36.07,181.61 180 bottom
R185  1K  [0603-RES]  23.37,182.56 180 bottom
R186  1K  [0603-RES]  10.67,181.61 180 bottom
R187  1K  [0603-RES]  99.57,181.61 180 bottom
R188  1K  [0603-RES]  86.87,181.61 180 bottom
R189  1K  [0603-RES]  74.17,181.61 180 bottom
R190  1K  [0603-RES]  61.47,181.61 180 bottom
R191  4.7K  [0603-RES]  68.77,177.8 0 bottom
R192  4.7K  [0603-RES]  48.77,179.55 0 bottom
R193  4.7K  [0603-RES]  20.83,197.64 180 bottom
R194  68.1k  [0603-RES]  97.03,214.63 180 bottom
R195  100  [0603-RES]  74.17,217.17 180 bottom
R196  68.1k  [0603-RES]  84.33,214.63 180 bottom
R197  100  [0603-RES]  61.47,217.17 180 bottom
R198  68.1k  [0603-RES]  71.63,214.63 180 bottom
R199  TSR-3386  [3386U]  22.1,209.87 0 top
R200  330  [0603-RES]  10.67,209.23 0 bottom
R201  100  [0603-RES]  48.77,217.17 180 bottom
R202  68.1k  [0603-RES]  58.93,214.63 180 bottom
R203  100  [0603-RES]  36.07,217.17 180 bottom
R204  100  [0603-RES]  23.37,217.17 180 bottom
R205  100  [0603-RES]  10.67,217.17 180 bottom
R206  68.1k  [0603-RES]  46.23,214.63 180 bottom
R207  68.1k  [0603-RES]  33.53,214.63 180 bottom
R208  68.1k  [0603-RES]  20.83,214.63 180 bottom
R209  100  [0603-RES]  99.57,217.17 180 bottom
R210  4.7K  [0603-RES]  87.5,205.42 90 bottom
R211  4.7K  [0603-RES]  89.09,205.42 90 bottom
R212  68.1k  [0603-RES]  109.73,214.63 180 bottom
R213  100  [0603-RES]  86.87,217.17 180 bottom
R214  100  [0603-RES]  57.34,209.87 180 bottom
R215  1K  [0603-RES]  48.77,212.09 180 bottom
R216  1K  [0603-RES]  36.07,212.09 180 bottom
R217  1K  [0603-RES]  23.37,213.04 180 bottom
R218  1K  [0603-RES]  10.67,212.09 180 bottom
R219  1K  [0603-RES]  99.57,212.09 180 bottom
R220  1K  [0603-RES]  86.87,212.09 180 bottom
R221  1K  [0603-RES]  74.17,212.09 180 bottom
R222  1K  [0603-RES]  61.47,212.09 180 bottom
R223  4.7K  [0603-RES]  68.77,208.28 0 bottom
R224  4.7K  [0603-RES]  48.77,210.03 0 bottom
R225  4.7K  [0603-RES]  20.83,228.12 180 bottom
R226  68.1k  [0603-RES]  97.03,245.11 180 bottom
R227  100  [0603-RES]  74.17,247.65 180 bottom
R228  68.1k  [0603-RES]  84.33,245.11 180 bottom
R229  100  [0603-RES]  61.47,247.65 180 bottom
R230  68.1k  [0603-RES]  71.63,245.11 180 bottom
R231  TSR-3386  [3386U]  22.1,240.35 0 top
R232  330  [0603-RES]  10.67,239.71 0 bottom
R233  100  [0603-RES]  48.77,247.65 180 bottom
R234  68.1k  [0603-RES]  58.93,245.11 180 bottom
R235  100  [0603-RES]  36.07,247.65 180 bottom
R236  100  [0603-RES]  23.37,247.65 180 bottom
R237  100  [0603-RES]  10.67,247.65 180 bottom
R238  68.1k  [0603-RES]  46.23,245.11 180 bottom
R239  68.1k  [0603-RES]  33.53,245.11 180 bottom
R240  68.1k  [0603-RES]  20.83,245.11 180 bottom
R241  100  [0603-RES]  99.57,247.65 180 bottom
R242  4.7K  [0603-RES]  87.5,235.9 90 bottom
R243  4.7K  [0603-RES]  89.09,235.9 90 bottom
R244  68.1k  [0603-RES]  109.73,245.11 180 bottom
R245  100  [0603-RES]  86.87,247.65 180 bottom
R246  100  [0603-RES]  57.34,240.35 180 bottom
R247  1K  [0603-RES]  48.77,242.57 180 bottom
R248  1K  [0603-RES]  36.07,242.57 180 bottom
R249  1K  [0603-RES]  23.37,243.52 180 bottom
R250  1K  [0603-RES]  10.67,242.57 180 bottom
R251  1K  [0603-RES]  99.57,242.57 180 bottom
R252  1K  [0603-RES]  86.87,242.57 180 bottom
R253  1K  [0603-RES]  74.17,242.57 180 bottom
R254  1K  [0603-RES]  61.47,242.57 180 bottom
R255  4.7K  [0603-RES]  68.77,238.76 0 bottom
R256  4.7K  [0603-RES]  48.77,240.51 0 bottom
R257  4.7K  [0603-RES]  20.83,258.6 180 bottom
R258  68.1k  [0603-RES]  97.03,275.59 180 bottom
R259  100  [0603-RES]  74.17,278.13 180 bottom
R260  68.1k  [0603-RES]  84.33,275.59 180 bottom
R261  100  [0603-RES]  61.47,278.13 180 bottom
R262  68.1k  [0603-RES]  71.63,275.59 180 bottom
R263  TSR-3386  [3386U]  22.1,270.83 0 top
R264  330  [0603-RES]  10.67,270.19 0 bottom
R265  100  [0603-RES]  48.77,278.13 180 bottom
R266  68.1k  [0603-RES]  58.93,275.59 180 bottom
R267  100  [0603-RES]  36.07,278.13 180 bottom
R268  100  [0603-RES]  23.37,278.13 180 bottom
R269  100  [0603-RES]  10.67,278.13 180 bottom
R270  68.1k  [0603-RES]  46.23,275.59 180 bottom
R271  68.1k  [0603-RES]  33.53,275.59 180 bottom
R272  68.1k  [0603-RES]  20.83,275.59 180 bottom
R273  100  [0603-RES]  99.57,278.13 180 bottom
R274  4.7K  [0603-RES]  87.5,266.38 90 bottom
R275  4.7K  [0603-RES]  89.09,266.38 90 bottom
R276  68.1k  [0603-RES]  109.73,275.59 180 bottom
R277  100  [0603-RES]  86.87,278.13 180 bottom
R278  100  [0603-RES]  57.34,270.83 180 bottom
R279  1K  [0603-RES]  48.77,273.05 180 bottom
R280  1K  [0603-RES]  36.07,273.05 180 bottom
R281  1K  [0603-RES]  23.37,274 180 bottom
R282  1K  [0603-RES]  10.67,273.05 180 bottom
R283  1K  [0603-RES]  99.57,273.05 180 bottom
R284  1K  [0603-RES]  86.87,273.05 180 bottom
R285  1K  [0603-RES]  74.17,273.05 180 bottom
R286  1K  [0603-RES]  61.47,273.05 180 bottom
R287  4.7K  [0603-RES]  68.77,269.24 0 bottom
R288  4.7K  [0603-RES]  48.77,270.99 0 bottom
R289  4.7K  [0603-RES]  20.83,289.08 180 bottom
R290  68.1k  [0603-RES]  97.03,306.07 180 bottom
R291  100  [0603-RES]  74.17,308.61 180 bottom
R292  68.1k  [0603-RES]  84.33,306.07 180 bottom
R293  100  [0603-RES]  61.47,308.61 180 bottom
R294  68.1k  [0603-RES]  71.63,306.07 180 bottom
R295  TSR-3386  [3386U]  22.1,301.31 0 top
R296  330  [0603-RES]  10.67,300.67 0 bottom
R297  100  [0603-RES]  48.77,308.61 180 bottom
R298  68.1k  [0603-RES]  58.93,306.07 180 bottom
R299  100  [0603-RES]  36.07,308.61 180 bottom
R300  100  [0603-RES]  23.37,308.61 180 bottom
R301  100  [0603-RES]  10.67,308.61 180 bottom
R302  68.1k  [0603-RES]  46.23,306.07 180 bottom
R303  68.1k  [0603-RES]  33.53,306.07 180 bottom
R304  68.1k  [0603-RES]  20.83,306.07 180 bottom
R305  100  [0603-RES]  99.57,308.61 180 bottom
R306  4.7K  [0603-RES]  87.5,296.86 90 bottom
R307  4.7K  [0603-RES]  89.09,296.86 90 bottom
R308  68.1k  [0603-RES]  109.73,306.07 180 bottom
R309  100  [0603-RES]  86.87,308.61 180 bottom
R310  100  [0603-RES]  57.34,301.31 180 bottom
R311  1K  [0603-RES]  48.77,303.53 180 bottom
R312  1K  [0603-RES]  36.07,303.53 180 bottom
R313  1K  [0603-RES]  23.37,304.48 180 bottom
R314  1K  [0603-RES]  10.67,303.53 180 bottom
R315  1K  [0603-RES]  99.57,303.53 180 bottom
R316  1K  [0603-RES]  86.87,303.53 180 bottom
R317  1K  [0603-RES]  74.17,303.53 180 bottom
R318  1K  [0603-RES]  61.47,303.53 180 bottom
R319  4.7K  [0603-RES]  68.77,299.72 0 bottom
R320  4.7K  [0603-RES]  48.77,301.47 0 bottom
SJ1  A0  [PAD-JUMPER-3-2OF3_NC_BY_PASTE_YES_SILK_FULL_BOX]  65.91,24.13 270 bottom
SJ2  A1  [PAD-JUMPER-3-2OF3_NC_BY_PASTE_YES_SILK_FULL_BOX]  49.09,24.13 270 bottom
SJ3  A1  [PAD-JUMPER-3-3OF3_NC_BY_TRACE_YES_SILK_FULL_BOX]  91.47,24.61 90 top
SJ4  A0  [PAD-JUMPER-3-2OF3_NC_BY_PASTE_YES_SILK_FULL_BOX]  65.91,54.61 270 bottom
SJ5  JUMPER-PAD-3-2OF3_NC_BY_TRACE_SMALL  [PAD-JUMPER-3-2OF3_NC_BY_TRACE_YES_SILK_FULL_BOX]  94.01,24.61 90 top
SJ6  A1  [PAD-JUMPER-3-2OF3_NC_BY_PASTE_YES_SILK_FULL_BOX]  49.09,54.61 270 bottom
SJ7  A1  [PAD-JUMPER-3-3OF3_NC_BY_TRACE_YES_SILK_FULL_BOX]  91.47,55.09 90 top
SJ8  JUMPER-PAD-3-2OF3_NC_BY_TRACE_SMALL  [PAD-JUMPER-3-2OF3_NC_BY_TRACE_YES_SILK_FULL_BOX]  94.01,55.09 90 top
SJ9  A0  [PAD-JUMPER-3-2OF3_NC_BY_PASTE_YES_SILK_FULL_BOX]  65.91,85.09 270 bottom
SJ10  A1  [PAD-JUMPER-3-2OF3_NC_BY_PASTE_YES_SILK_FULL_BOX]  49.09,85.09 270 bottom
SJ11  A1  [PAD-JUMPER-3-3OF3_NC_BY_TRACE_YES_SILK_FULL_BOX]  91.47,85.57 90 top
SJ12  JUMPER-PAD-3-2OF3_NC_BY_TRACE_SMALL  [PAD-JUMPER-3-2OF3_NC_BY_TRACE_YES_SILK_FULL_BOX]  94.01,85.57 90 top
SJ13  A0  [PAD-JUMPER-3-2OF3_NC_BY_PASTE_YES_SILK_FULL_BOX]  65.91,115.57 270 bottom
SJ14  A1  [PAD-JUMPER-3-2OF3_NC_BY_PASTE_YES_SILK_FULL_BOX]  49.09,115.57 270 bottom
SJ15  A1  [PAD-JUMPER-3-3OF3_NC_BY_TRACE_YES_SILK_FULL_BOX]  91.47,116.05 90 top
SJ16  JUMPER-PAD-3-2OF3_NC_BY_TRACE_SMALL  [PAD-JUMPER-3-2OF3_NC_BY_TRACE_YES_SILK_FULL_BOX]  94.01,116.05 90 top
SJ17  A0  [PAD-JUMPER-3-2OF3_NC_BY_PASTE_YES_SILK_FULL_BOX]  65.91,146.05 270 bottom
SJ18  A1  [PAD-JUMPER-3-2OF3_NC_BY_PASTE_YES_SILK_FULL_BOX]  49.09,146.05 270 bottom
SJ19  A1  [PAD-JUMPER-3-3OF3_NC_BY_TRACE_YES_SILK_FULL_BOX]  91.47,146.53 90 top
SJ20  JUMPER-PAD-3-2OF3_NC_BY_TRACE_SMALL  [PAD-JUMPER-3-2OF3_NC_BY_TRACE_YES_SILK_FULL_BOX]  94.01,146.53 90 top
SJ21  A0  [PAD-JUMPER-3-2OF3_NC_BY_PASTE_YES_SILK_FULL_BOX]  65.91,176.53 270 bottom
SJ22  A1  [PAD-JUMPER-3-2OF3_NC_BY_PASTE_YES_SILK_FULL_BOX]  49.09,176.53 270 bottom
SJ23  A1  [PAD-JUMPER-3-3OF3_NC_BY_TRACE_YES_SILK_FULL_BOX]  91.47,177.01 90 top
SJ24  JUMPER-PAD-3-2OF3_NC_BY_TRACE_SMALL  [PAD-JUMPER-3-2OF3_NC_BY_TRACE_YES_SILK_FULL_BOX]  94.01,177.01 90 top
SJ25  A0  [PAD-JUMPER-3-2OF3_NC_BY_PASTE_YES_SILK_FULL_BOX]  65.91,207.01 270 bottom
SJ26  A1  [PAD-JUMPER-3-2OF3_NC_BY_PASTE_YES_SILK_FULL_BOX]  49.09,207.01 270 bottom
SJ27  A1  [PAD-JUMPER-3-3OF3_NC_BY_TRACE_YES_SILK_FULL_BOX]  91.47,207.49 90 top
SJ28  JUMPER-PAD-3-2OF3_NC_BY_TRACE_SMALL  [PAD-JUMPER-3-2OF3_NC_BY_TRACE_YES_SILK_FULL_BOX]  94.01,207.49 90 top
SJ29  A0  [PAD-JUMPER-3-2OF3_NC_BY_PASTE_YES_SILK_FULL_BOX]  65.91,237.49 270 bottom
SJ30  A1  [PAD-JUMPER-3-2OF3_NC_BY_PASTE_YES_SILK_FULL_BOX]  49.09,237.49 270 bottom
SJ31  A1  [PAD-JUMPER-3-3OF3_NC_BY_TRACE_YES_SILK_FULL_BOX]  91.47,237.97 90 top
SJ32  JUMPER-PAD-3-2OF3_NC_BY_TRACE_SMALL  [PAD-JUMPER-3-2OF3_NC_BY_TRACE_YES_SILK_FULL_BOX]  94.01,237.97 90 top
SJ33  A0  [PAD-JUMPER-3-2OF3_NC_BY_PASTE_YES_SILK_FULL_BOX]  65.91,267.97 270 bottom
SJ34  A1  [PAD-JUMPER-3-2OF3_NC_BY_PASTE_YES_SILK_FULL_BOX]  49.09,267.97 270 bottom
SJ35  A1  [PAD-JUMPER-3-3OF3_NC_BY_TRACE_YES_SILK_FULL_BOX]  91.47,268.45 90 top
SJ36  JUMPER-PAD-3-2OF3_NC_BY_TRACE_SMALL  [PAD-JUMPER-3-2OF3_NC_BY_TRACE_YES_SILK_FULL_BOX]  94.01,268.45 90 top
SJ37  A0  [PAD-JUMPER-3-2OF3_NC_BY_PASTE_YES_SILK_FULL_BOX]  65.91,298.45 270 bottom
SJ38  A1  [PAD-JUMPER-3-2OF3_NC_BY_PASTE_YES_SILK_FULL_BOX]  49.09,298.45 270 bottom
SJ39  A1  [PAD-JUMPER-3-3OF3_NC_BY_TRACE_YES_SILK_FULL_BOX]  91.47,298.93 90 top
SJ40  JUMPER-PAD-3-2OF3_NC_BY_TRACE_SMALL  [PAD-JUMPER-3-2OF3_NC_BY_TRACE_YES_SILK_FULL_BOX]  94.01,298.93 90 top
STANDOFF1  STAND-OFF  [STAND-OFF]  41.15,11.43 90 top
STANDOFF2  STAND-OFF  [STAND-OFF]  47.5,11.43 90 top
STANDOFF3  STAND-OFF  [STAND-OFF]  55.28,11.43 90 top
STANDOFF4  STAND-OFF  [STAND-OFF]  65.12,11.43 90 top
STANDOFF5  STAND-OFF  [STAND-OFF]  72.9,11.43 90 top
STANDOFF6  STAND-OFF  [STAND-OFF]  79.25,11.43 90 top
STANDOFF7  STAND-OFF  [STAND-OFF]  41.15,41.91 90 top
STANDOFF8  STAND-OFF  [STAND-OFF]  47.5,41.91 90 top
STANDOFF9  STAND-OFF  [STAND-OFF]  55.28,41.91 90 top
STANDOFF10  STAND-OFF  [STAND-OFF]  65.12,41.91 90 top
STANDOFF11  STAND-OFF  [STAND-OFF]  72.9,41.91 90 top
STANDOFF12  STAND-OFF  [STAND-OFF]  79.25,41.91 90 top
STANDOFF13  STAND-OFF  [STAND-OFF]  41.15,72.39 90 top
STANDOFF14  STAND-OFF  [STAND-OFF]  47.5,72.39 90 top
STANDOFF15  STAND-OFF  [STAND-OFF]  55.28,72.39 90 top
STANDOFF16  STAND-OFF  [STAND-OFF]  65.12,72.39 90 top
STANDOFF17  STAND-OFF  [STAND-OFF]  72.9,72.39 90 top
STANDOFF18  STAND-OFF  [STAND-OFF]  79.25,72.39 90 top
STANDOFF19  STAND-OFF  [STAND-OFF]  41.15,102.87 90 top
STANDOFF20  STAND-OFF  [STAND-OFF]  47.5,102.87 90 top
STANDOFF21  STAND-OFF  [STAND-OFF]  55.28,102.87 90 top
STANDOFF22  STAND-OFF  [STAND-OFF]  65.12,102.87 90 top
STANDOFF23  STAND-OFF  [STAND-OFF]  72.9,102.87 90 top
STANDOFF24  STAND-OFF  [STAND-OFF]  79.25,102.87 90 top
STANDOFF25  STAND-OFF  [STAND-OFF]  41.15,133.35 90 top
STANDOFF26  STAND-OFF  [STAND-OFF]  47.5,133.35 90 top
STANDOFF27  STAND-OFF  [STAND-OFF]  55.28,133.35 90 top
STANDOFF28  STAND-OFF  [STAND-OFF]  65.12,133.35 90 top
STANDOFF29  STAND-OFF  [STAND-OFF]  72.9,133.35 90 top
STANDOFF30  STAND-OFF  [STAND-OFF]  79.25,133.35 90 top
STANDOFF31  STAND-OFF  [STAND-OFF]  41.15,163.83 90 top
STANDOFF32  STAND-OFF  [STAND-OFF]  47.5,163.83 90 top
STANDOFF33  STAND-OFF  [STAND-OFF]  55.28,163.83 90 top
STANDOFF34  STAND-OFF  [STAND-OFF]  65.12,163.83 90 top
STANDOFF35  STAND-OFF  [STAND-OFF]  72.9,163.83 90 top
STANDOFF36  STAND-OFF  [STAND-OFF]  79.25,163.83 90 top
STANDOFF37  STAND-OFF  [STAND-OFF]  41.15,194.31 90 top
STANDOFF38  STAND-OFF  [STAND-OFF]  47.5,194.31 90 top
STANDOFF39  STAND-OFF  [STAND-OFF]  55.28,194.31 90 top
STANDOFF40  STAND-OFF  [STAND-OFF]  65.12,194.31 90 top
STANDOFF41  STAND-OFF  [STAND-OFF]  72.9,194.31 90 top
STANDOFF42  STAND-OFF  [STAND-OFF]  79.25,194.31 90 top
STANDOFF43  STAND-OFF  [STAND-OFF]  41.15,224.79 90 top
STANDOFF44  STAND-OFF  [STAND-OFF]  47.5,224.79 90 top
STANDOFF45  STAND-OFF  [STAND-OFF]  55.28,224.79 90 top
STANDOFF46  STAND-OFF  [STAND-OFF]  65.12,224.79 90 top
STANDOFF47  STAND-OFF  [STAND-OFF]  72.9,224.79 90 top
STANDOFF48  STAND-OFF  [STAND-OFF]  79.25,224.79 90 top
STANDOFF49  STAND-OFF  [STAND-OFF]  41.15,255.27 90 top
STANDOFF50  STAND-OFF  [STAND-OFF]  47.5,255.27 90 top
STANDOFF51  STAND-OFF  [STAND-OFF]  55.28,255.27 90 top
STANDOFF52  STAND-OFF  [STAND-OFF]  65.12,255.27 90 top
STANDOFF53  STAND-OFF  [STAND-OFF]  72.9,255.27 90 top
STANDOFF54  STAND-OFF  [STAND-OFF]  79.25,255.27 90 top
STANDOFF55  STAND-OFF  [STAND-OFF]  41.15,285.75 90 top
STANDOFF56  STAND-OFF  [STAND-OFF]  47.5,285.75 90 top
STANDOFF57  STAND-OFF  [STAND-OFF]  55.28,285.75 90 top
STANDOFF58  STAND-OFF  [STAND-OFF]  65.12,285.75 90 top
STANDOFF59  STAND-OFF  [STAND-OFF]  72.9,285.75 90 top
STANDOFF60  STAND-OFF  [STAND-OFF]  79.25,285.75 90 top
U1  SX1509  [QFN-28]  55.12,22.86 90 bottom
U2  74AC125  [SO14]  79.25,22.23 270 bottom
U3  3.3V/150mA  [SOT23-5]  94.49,19.05 0 bottom
U4  LM1117  [SOT223]  28.29,48.74 90 bottom
U5  LM1117  [SOT223]  28.29,18.26 90 bottom
U6  74AC125  [SO14]  41.15,22.23 270 bottom
U7  QRE1113  [QRE1113]  91.95,63.5 180 bottom
U8  QRE1113  [QRE1113]  104.65,63.5 180 bottom
U9  QRE1113  [QRE1113]  79.25,63.5 180 bottom
U10  QRE1113  [QRE1113]  66.55,63.5 180 bottom
U11  QRE1113  [QRE1113]  53.85,63.5 180 bottom
U12  QRE1113  [QRE1113]  41.15,63.5 180 bottom
U13  QRE1113  [QRE1113]  28.45,63.5 180 bottom
U14  QRE1113  [QRE1113]  15.75,63.5 180 bottom
U15  SX1509  [QFN-28]  55.12,53.34 90 bottom
U16  3.3V/150mA  [SOT23-5]  94.49,49.53 0 bottom
U17  74AC125  [SO14]  41.15,52.7 270 bottom
U18  74AC125  [SO14]  79.25,52.7 270 bottom
U19  LM1117  [SOT223]  28.29,79.22 90 bottom
U20  QRE1113  [QRE1113]  91.95,93.98 180 bottom
U21  QRE1113  [QRE1113]  104.65,93.98 180 bottom
U22  QRE1113  [QRE1113]  79.25,93.98 180 bottom
U23  QRE1113  [QRE1113]  66.55,93.98 180 bottom
U24  QRE1113  [QRE1113]  53.85,93.98 180 bottom
U25  QRE1113  [QRE1113]  41.15,93.98 180 bottom
U26  QRE1113  [QRE1113]  28.45,93.98 180 bottom
U27  QRE1113  [QRE1113]  15.75,93.98 180 bottom
U28  SX1509  [QFN-28]  55.12,83.82 90 bottom
U29  3.3V/150mA  [SOT23-5]  94.49,80.01 0 bottom
U30  74AC125  [SO14]  41.15,83.19 270 bottom
U31  74AC125  [SO14]  79.25,83.19 270 bottom
U32  LM1117  [SOT223]  28.29,109.7 90 bottom
U33  QRE1113  [QRE1113]  91.95,124.46 180 bottom
U34  QRE1113  [QRE1113]  104.65,124.46 180 bottom
U35  QRE1113  [QRE1113]  79.25,124.46 180 bottom
U36  QRE1113  [QRE1113]  66.55,124.46 180 bottom
U37  QRE1113  [QRE1113]  53.85,124.46 180 bottom
U38  QRE1113  [QRE1113]  41.15,124.46 180 bottom
U39  QRE1113  [QRE1113]  28.45,124.46 180 bottom
U40  QRE1113  [QRE1113]  15.75,124.46 180 bottom
U41  SX1509  [QFN-28]  55.12,114.3 90 bottom
U42  3.3V/150mA  [SOT23-5]  94.49,110.49 0 bottom
U43  74AC125  [SO14]  41.15,113.67 270 bottom
U44  74AC125  [SO14]  79.25,113.67 270 bottom
U45  LM1117  [SOT223]  28.29,140.18 90 bottom
U46  QRE1113  [QRE1113]  91.95,154.94 180 bottom
U47  QRE1113  [QRE1113]  104.65,154.94 180 bottom
U48  QRE1113  [QRE1113]  79.25,154.94 180 bottom
U49  QRE1113  [QRE1113]  66.55,154.94 180 bottom
U50  QRE1113  [QRE1113]  53.85,154.94 180 bottom
U51  QRE1113  [QRE1113]  41.15,154.94 180 bottom
U52  QRE1113  [QRE1113]  28.45,154.94 180 bottom
U53  QRE1113  [QRE1113]  15.75,154.94 180 bottom
U54  SX1509  [QFN-28]  55.12,144.78 90 bottom
U55  3.3V/150mA  [SOT23-5]  94.49,140.97 0 bottom
U56  74AC125  [SO14]  41.15,144.15 270 bottom
U57  74AC125  [SO14]  79.25,144.15 270 bottom
U58  LM1117  [SOT223]  28.29,170.66 90 bottom
U59  QRE1113  [QRE1113]  91.95,185.42 180 bottom
U60  QRE1113  [QRE1113]  104.65,185.42 180 bottom
U61  QRE1113  [QRE1113]  79.25,185.42 180 bottom
U62  QRE1113  [QRE1113]  66.55,185.42 180 bottom
U63  QRE1113  [QRE1113]  53.85,185.42 180 bottom
U64  QRE1113  [QRE1113]  41.15,185.42 180 bottom
U65  QRE1113  [QRE1113]  28.45,185.42 180 bottom
U66  QRE1113  [QRE1113]  15.75,185.42 180 bottom
U67  SX1509  [QFN-28]  55.12,175.26 90 bottom
U68  3.3V/150mA  [SOT23-5]  94.49,171.45 0 bottom
U69  74AC125  [SO14]  41.15,174.62 270 bottom
U70  74AC125  [SO14]  79.25,174.62 270 bottom
U71  LM1117  [SOT223]  28.29,201.14 90 bottom
U72  QRE1113  [QRE1113]  91.95,215.9 180 bottom
U73  QRE1113  [QRE1113]  104.65,215.9 180 bottom
U74  QRE1113  [QRE1113]  79.25,215.9 180 bottom
U75  QRE1113  [QRE1113]  66.55,215.9 180 bottom
U76  QRE1113  [QRE1113]  53.85,215.9 180 bottom
U77  QRE1113  [QRE1113]  41.15,215.9 180 bottom
U78  QRE1113  [QRE1113]  28.45,215.9 180 bottom
U79  QRE1113  [QRE1113]  15.75,215.9 180 bottom
U80  SX1509  [QFN-28]  55.12,205.74 90 bottom
U81  3.3V/150mA  [SOT23-5]  94.49,201.93 0 bottom
U82  74AC125  [SO14]  41.15,205.1 270 bottom
U83  74AC125  [SO14]  79.25,205.1 270 bottom
U84  LM1117  [SOT223]  28.29,231.62 90 bottom
U85  QRE1113  [QRE1113]  91.95,246.38 180 bottom
U86  QRE1113  [QRE1113]  104.65,246.38 180 bottom
U87  QRE1113  [QRE1113]  79.25,246.38 180 bottom
U88  QRE1113  [QRE1113]  66.55,246.38 180 bottom
U89  QRE1113  [QRE1113]  53.85,246.38 180 bottom
U90  QRE1113  [QRE1113]  41.15,246.38 180 bottom
U91  QRE1113  [QRE1113]  28.45,246.38 180 bottom
U92  QRE1113  [QRE1113]  15.75,246.38 180 bottom
U93  SX1509  [QFN-28]  55.12,236.22 90 bottom
U94  3.3V/150mA  [SOT23-5]  94.49,232.41 0 bottom
U95  74AC125  [SO14]  41.15,235.59 270 bottom
U96  74AC125  [SO14]  79.25,235.59 270 bottom
U97  LM1117  [SOT223]  28.29,262.1 90 bottom
U98  QRE1113  [QRE1113]  91.95,276.86 180 bottom
U99  QRE1113  [QRE1113]  104.65,276.86 180 bottom
U100  QRE1113  [QRE1113]  79.25,276.86 180 bottom
U101  QRE1113  [QRE1113]  104.65,33.02 180 bottom
U102  QRE1113  [QRE1113]  91.95,33.02 180 bottom
U103  QRE1113  [QRE1113]  79.25,33.02 180 bottom
U104  QRE1113  [QRE1113]  66.55,33.02 180 bottom
U105  QRE1113  [QRE1113]  53.85,33.02 180 bottom
U106  QRE1113  [QRE1113]  41.15,33.02 180 bottom
U107  QRE1113  [QRE1113]  28.45,33.02 180 bottom
U108  QRE1113  [QRE1113]  15.75,33.02 180 bottom
U109  QRE1113  [QRE1113]  66.55,276.86 180 bottom
U110  QRE1113  [QRE1113]  53.85,276.86 180 bottom
U111  QRE1113  [QRE1113]  41.15,276.86 180 bottom
U112  QRE1113  [QRE1113]  28.45,276.86 180 bottom
U113  QRE1113  [QRE1113]  15.75,276.86 180 bottom
U114  SX1509  [QFN-28]  55.12,266.7 90 bottom
U115  3.3V/150mA  [SOT23-5]  94.49,262.89 0 bottom
U116  74AC125  [SO14]  41.15,266.06 270 bottom
U117  74AC125  [SO14]  79.25,266.06 270 bottom
U118  LM1117  [SOT223]  28.29,292.58 90 bottom
U119  QRE1113  [QRE1113]  91.95,307.34 180 bottom
U120  QRE1113  [QRE1113]  104.65,307.34 180 bottom
U121  QRE1113  [QRE1113]  79.25,307.34 180 bottom
U122  QRE1113  [QRE1113]  66.55,307.34 180 bottom
U123  QRE1113  [QRE1113]  53.85,307.34 180 bottom
U124  QRE1113  [QRE1113]  41.15,307.34 180 bottom
U125  QRE1113  [QRE1113]  28.45,307.34 180 bottom
U126  QRE1113  [QRE1113]  15.75,307.34 180 bottom
U127  SX1509  [QFN-28]  55.12,297.18 90 bottom
U128  3.3V/150mA  [SOT23-5]  94.49,293.37 0 bottom
U129  74AC125  [SO14]  41.15,296.55 270 bottom
U130  74AC125  [SO14]  79.25,296.55 270 bottom

## Library data of the parts
C1-C3 C9-C11 C17-C19 C25-C27 C33-C35 C41-C43 C49-C51 C57-C59 C65-C67 C73-C75 = SparkFun-Capacitors; PROD_ID: CAP-00868
C4 C7 C12 C15 C20 C23 C28 C31 C36 C39 C44 C47 C52 C55 C60 C63 C68 C71 C76 C79 = SparkFun-Capacitors; PROD_ID: CAP-07888
C5 C6 C13 C14 C21 C22 C29 C30 C37 C38 C45 C46 C53 C54 C61 C62 C69 C70 C77 C78 = SparkFun-Capacitors; PROD_ID: CAP-07884
C8 C16 C24 C32 C40 C48 C56 C64 C72 C80 = SparkFun-Capacitors; PROD_ID: CAP-00811
D1-D90 = SparkFun-LED; PROD_ID: DIO-11076
E$1 = SparkFun-Retired
E$5 E$6 FID1-FID20 LOGO1-LOGO40 = SparkFun-Aesthetics
JP1 JP3 JP5 JP7 JP9 JP11 JP13 JP15 JP17 JP19 = SparkFun-Connectors; PROD_ID: CONN-11566
JP2 JP4 JP6 JP8 JP10 JP12 JP14 JP16 JP18 JP20 = SparkFun-Connectors
Q1-Q10 = SparkFun-DiscreteSemi; PROD_ID: TRANS-11151
R1 R15 R30 R32-R34 R50 R51 R63-R65 R82 R83 R95-R97 R114 R115 R127-R129 R146 R147 R159-R161 R178 R179 R191-R193 R210 R211 R223-R225 R242 R243 R255-R257 R274 R275 R287-R289 R306 R307 R319 R320 = SparkFun-Resistors; PROD_ID: RES-07857
R2 R40 R72 R104 R136 R168 R200 R232 R264 R296 = SparkFun-Resistors; PROD_ID: RES-00818
R3 R9 R11 R13 R21 R23-R25 R31 R35 R37 R41 R43-R45 R49 R53 R54 R67 R69 R73 R75-R77 R81 R85 R86 R99 R101 R105 R107-R109 R113 R117 R118 R131 R133 R137 R139-R141 R145 R149 R150 R163 R165 R169 R171-R173 R177 R181 R182 R195 R197 R201 R203-R205 R209 R213 R214 R227 R229 R233 R235-R237 R241 R245 R246 R259 R261 R265 R267-R269 R273 R277 R278 R291 R293 R297 R299-R301 R305 R309 R310 = SparkFun-Resistors; PROD_ID: RES-07863
R4 R10 R12 R14 R22 R26-R29 R36 R38 R42 R46-R48 R52 R66 R68 R70 R74 R78-R80 R84 R98 R100 R102 R106 R110-R112 R116 R130 R132 R134 R138 R142-R144 R148 R162 R164 R166 R170 R174-R176 R180 R194 R196 R198 R202 R206-R208 R212 R226 R228 R230 R234 R238-R240 R244 R258 R260 R262 R266 R270-R272 R276 R290 R292 R294 R298 R302-R304 R308 = SparkFun-Resistors; PROD_ID: RES-09380
R5-R8 R17-R20 R55-R62 R87-R94 R119-R126 R151-R158 R183-R190 R215-R222 R247-R254 R279-R286 R311-R318 = SparkFun-Resistors; PROD_ID: RES-07856
R16 R39 R71 R103 R135 R167 R199 R231 R263 R295 = SparkFun-Electromechanical; PROD_ID: RES-09730
SJ1-SJ40 = SparkFun-Passives
STANDOFF1-STANDOFF60 = SparkFun-Electromechanical
U1 U15 U28 U41 U54 U67 U80 U93 U114 U127 = SparkFun-DigitalIC; PROD_ID: IC-11311
U2 U6 U17 U18 U30 U31 U43 U44 U56 U57 U69 U70 U82 U83 U95 U96 U116 U117 U129 U130 = SparkFun-DigitalIC; PROD_ID: IC-08880
U3 U16 U29 U42 U55 U68 U81 U94 U115 U128 = SparkFun-PowerIC; PROD_ID: VREG-00822
U4 U5 U19 U32 U45 U58 U71 U84 U97 U118 = SparkFun-PowerIC; PROD_ID: VREG-08170
U7-U14 U20-U27 U33-U40 U46-U53 U59-U66 U72-U79 U85-U92 U98-U113 U119-U126 = SparkFun-Sensors; PROD_ID: IC-09357